# Altium PCB Smart_Podium.PcbDoc (part 2 of 3)
Units mm, origin at the board's own origin, x right, y up, seen from the top; angles counter-clockwise.
Board outline 100 x 100 mm, 4 copper layers (Top Layer, Inner Layer 1 (GND), Inner Layer 2 (GND), Bottom Layer), stack 1.57 mm thick; 107 components, 94 nets, 341 pads, 455 vias.
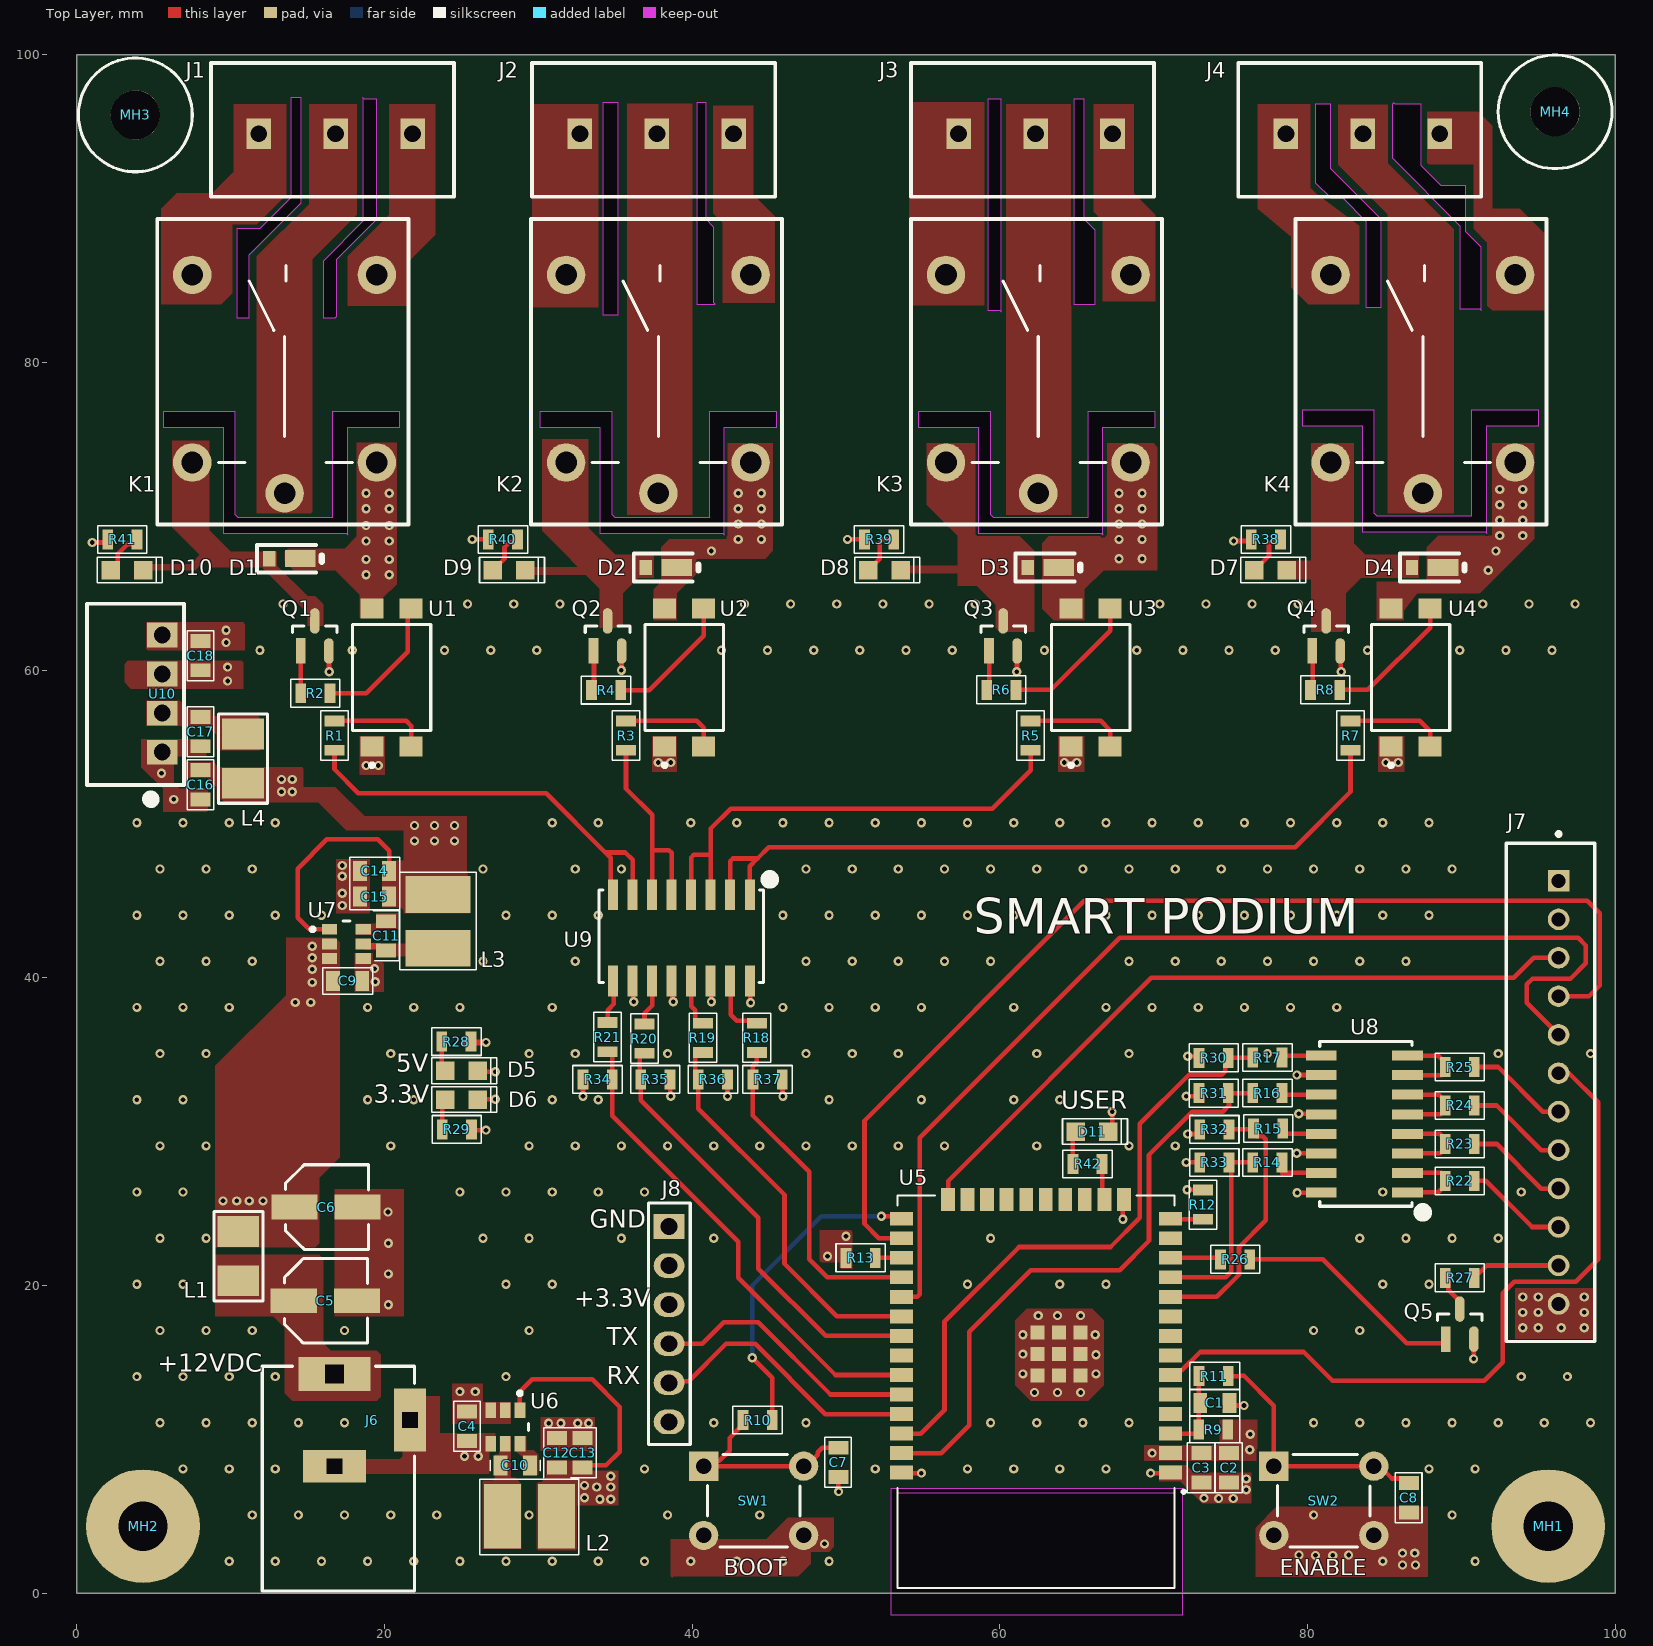
[diagram p0: Top Layer view]

## Part data (continued)
U8 U9: "MMPQ39 Series NPN 1 W 40 V 200 mA General Purpose Transistor - SOIC-16", Case/Package=SOIC, Clock Frequency=250MHz, Collector Base Voltage (VCBO)=60V, Collector Emitter Breakdown Voltage=40V, Collector Emitter Saturation Voltage=100mV, Collector-emitter Voltage-Max=300mV, Current Rating=200mA, Emitter Base Voltage (VEBO)=6V, Manufacturer="ON Semiconductor / Fairchild", Max Operating Temperature=150°C, Max Power Dissipation=1W, Min Operating Temperature=-55°C, Package Quantity=48, Supplier Part Number 1=MMPQ3904FSCT-ND, Category=BJTs, Collector Emitter Voltage (VCEO)=40V, ComponentLink1Description=https://datasheet.ciiva.com/4722/mmpq3904-191413-4722320.pdf?src-supplier=Mouser, ComponentLink1URL=https://datasheet.ciiva.com/4722/mmpq3904-191413-4722320.pdf?src-supplier=Mouser, ComponentLink2Description=https://datasheet.ciiva.com/1193/1727651-1193875.pdf?src-supplier=Element14, ComponentLink2URL=https://datasheet.ciiva.com/1193/1727651-1193875.pdf?src-supplier=Element14, ComponentLink3Description=https://datasheet.ciiva.com/969/mmpq3904-d-969526.pdf?src-supplier=Digi-Key, ComponentLink3URL=https://datasheet.ciiva.com/969/mmpq3904-d-969526.pdf?src-supplier=Digi-Key, ComponentLink4Description=https://datasheet.ciiva.com/15139/getdatasheetpartid-95884-15139210.pdf?src-supplier=Verical, ComponentLink4URL=https://datasheet.ciiva.com/15139/getdatasheetpartid-95884-15139210.pdf?src-supplier=Verical, ComponentLink5Description=https://datasheet.ciiva.com/6362/ffb3904-6362790.pdf?src-supplier=Digi-Key, ComponentLink5URL=https://datasheet.ciiva.com/6362/ffb3904-6362790.pdf?src-supplier=Digi-Key, ComponentLink6Description=https://datasheet.ciiva.com/16776/ffb3904-16776279.pdf?src-supplier=Future+Electronics, ComponentLink6URL=https://datasheet.ciiva.com/16776/ffb3904-16776279.pdf?src-supplier=Future+Electronics, ComponentLink7Description=https://datasheet.ciiva.com/11197/fmb3904-11197433.pdf?src-supplier=Avnet, ComponentLink7URL=https://datasheet.ciiva.com/11197/fmb3904-11197433.pdf?src-supplier=Avnet, ComponentLink8Description=https://datasheet.ciiva.com/11205/fmb3904-11205885.pdf?src-supplier=Avnet, ComponentLink8URL=https://datasheet.ciiva.com/11205/fmb3904-11205885.pdf?src-supplier=Avnet, ComponentLink9Description=https://datasheet.ciiva.com/6362/ffb3904-6362793.pdf?src-supplier=Digi-Key, ComponentLink9URL=https://datasheet.ciiva.com/6362/ffb3904-6362793.pdf?src-supplier=Digi-Key, ComponentLink10Description=https://datasheet.ciiva.com/46415/1785343-46415819.pdf?src-supplier=Element14, ComponentLink10URL=https://datasheet.ciiva.com/46415/1785343-46415819.pdf?src-supplier=Element14, Frequency=250MHz, Gain Bandwidth Product=250MHz, Height=1.5mm, hFE Min=75, Lead Free="Lead Free", Length=10mm, Manufacturer Part Number=MMPQ3904, Max Breakdown Voltage=40V, Max Collector Current=200mA, Mounting Technology="Surface Mount", Number of Elements=4, Packaging="Tape and Reel", Pins=16, Polarity=NPN, Power Dissipation=1W, Pricing 1="1=2.10000, 10=1.88300, 100=1.51340, 500=1.24340, 1000=1.03025 (USD)", Radiation Hardening=No, Reach SVHC Compliant=Yes, RoHS=Yes, RoHS Compliant=Yes, Series=-, Stock 1=17276, Supplier 1=Digi-Key, Transition Frequency=250MHz, Voltage Rating (DC)=40V, Weight=0.143g, Width=4mm
U10: library part B0505S-1WR3, "1W, i/p: 4.5V ~ 5.5V, single o/p: 5V, SIP", Manufacturer=MORNSUN, Supplier Part Number 1=2725-B0505S-1WR3-ND, Category="Board Mount Modules", Manufacturer Part Number=B0505S-1WR3, Pricing 1="1=5.23000, 5=5.15200, 10=5.07800, 25=4.92840, 50=4.77900, 100=4.62970, 250=4.48032, 500=4.18162 (USD)", RoHS=Yes, Stock 1=49202, Supplier 1=Digi-Key

## Via types
v1: diameter 0.6, hole 0.3, Top Layer to Bottom Layer, tented both sides, 455 vias

## Nets (pads, with @x,y where several pads share a name; then routed paths per layer and width w, separated by ;. In a path a pad name is that pad's centre, name@x,y a point inside that pad or via, vN(x,y) a via of type N, cw(c..) or ccw(c..) an arc to the next point about the centre after c; other vN are vias at no path point)
5V_in: C17.2 L4.2 U10.2
+3V3: C2.2 C3.1 C12.2 C13.2 J7.2 J8.3 L2.2 R9.1 R13.2 R29.2 U5.2 U6.1 | length 16
  Top Layer w0.3: R29.2@25.45,30.15 25.5,30.1 v1@26.675,30.1 ; U6.1@28.8,11.899 28.8,13.1 29.6,13.9 33.5,13.9 35.3,12.1 35.3,9.2 34.4,8.3 C13.2@33,8.3 ; C13.2@32.875,8.175 C13.2@33,8.3 ; C13.2@33.175,8.475 C13.2@33,8.3
  other v1: 34,6.1 34.7,6.1 33,6.2 33.8,6.9 34.7,6.9 33,7 34.7,7.6 69.9,9.1 76.25,9.325 76.275,10.325 48.8,21.9 50,23.2 26.6,30.1
+5V: C14.2 C15.2 C16.2 J7.1 L3.2 L4.1 R28.2 U1.1 U2.1 U3.1 U4.1 U7.1 | length 15.4
  Top Layer w0.3: U7.1@16.422,43.154 15.096,43.154 14.35,43.9 14.35,47.1 16.25,49 19.55,49 20.3,48.25 C14.2@20.3,46.95
  Top Layer w0.4: 25.175,35.8 v1(26.6,35.8)
  other v1: 21.95,48.9 23.25,48.9 24.55,48.9 21.95,49.9 23.25,49.9 24.55,49.9 13.3,52.1 14,52.1 13.3,52.9 14,52.9 18.8,53.8 19.6,53.8 37.8,54 38.6,54 64.2,54 65,54 85.1,54 85.9,54
+5V_Relay: C18.2 D1.1 D2.1 D3.1 D4.1 K1.1 K2.1 K3.1 K4.1 R38.2 R39.2 R40.2 R41.2 U1.4 U2.4 U3.4 U4.4 U10.4 | length 4.4
  Top Layer w0.3: v1(1,68.3) 1.8,68.3 R41.2@2,68.5 ; v1(25.7,68.5) R40.2@26.75,68.5 ; v1(50.1,68.5) R39.2@51.2,68.5 ; v1(75.2,68.4) 76.25,68.4 R38.2@76.35,68.5
  other v1: 9.7,61.8 9.7,62.6 18.8,66.2 20.3,66.2 91.75,66.5 18.8,67.2 20.3,67.2 67.75,67.25 69.25,67.25 41.25,67.75 92.25,67.75 18.8,68.4 20.3,68.4 43,68.5 44.5,68.5 67.75,68.5 69.25,68.5 92.5,68.75 94,68.75 18.8,69.4 20.3,69.4 43,69.5 44.5,69.5 67.75,69.5 69.25,69.5 92.5,69.75 94,69.75 18.8,70.5 20.3,70.5 43,70.5 44.5,70.5 67.75,70.5 69.25,70.5 92.5,70.75 94,70.75 18.8,71.5 20.3,71.5 43,71.5 44.5,71.5 67.75,71.5 69.25,71.5 92.5,71.75 94,71.75
+12V: C4.2 C6.1 C9.2 L1.2 U6.2 U6.3 U7.2 U7.3
  other v1: 24.9,13.1 25.9,13.1 9.5,25.5 10.4,25.5 11.2,25.5 12.1,25.5 14.2,38.4 15.2,38.4 15.3,39.7 15.3,40.55 15.3,41.3 15.3,42.05
+12V_JACK: C5.1 J6.1 L1.1
BTN1: J7.3 U5.24 | length 46.9
  Top Layer w0.3: U5.24@56.635,25.59 56.635,26.79 69.845,40 93.4,40 94.7,41.3 J7.3@96.325,41.3
BTN2: J7.4 U5.26 | length 71.2
  Top Layer w0.3: U5.26@53.6,23.07 52.13,23.07 51.2,24 51.2,30.7 65.5,45 98.2,45 99,44.2 99,39.5 98.3,38.8 J7.4@96.325,38.8
BTN3: J7.5 U5.29 | length 70
  Top Layer w0.3: U5.29@53.6,19.26 54.624,19.26 54.8,19.436 54.8,29.6 67.8,42.6 97.6,42.6 98.1,42.1 98.1,40.95 97.1,39.95 94.631,39.95 94.25,39.569 94.25,38.375 J7.5@96.325,36.3
BTN4: J7.6 U5.6 | length 48
  Top Layer w0.3: U5.6@71.1,14.18 71.4,14.48 71.825,14.48 73.02,15.675 79.75,15.675 81.625,13.8 91.5,13.8 92.7,15 92.7,19.5 93.45,20.25 97.435,20.25 98.9,21.715 98.9,31.9 J7.6@97,33.8
BUCK3V3_BST: C10.2 U6.6
BUCK3V3_SW: C10.1 L2.1 U6.5
BUCK5V_BST: C11.2 U7.6
BUCK5V_SW: C11.1 L3.1 U7.5 | length 1.9
  Top Layer w0.4: U7.5@18.621,42.204 18.771,42.054 19.646,42.054 19.925,41.775 C11.1@20.125,41.775 ; L3.1@23.325,41.775 L3.1@23.475,41.925
BUTTON_BOOT: R10.2 U5.25 | length 20.9
  Top Layer w0.3: v1(43.9,15.3) 45.2,14 R10.2@45.2,11.25 ; v1(52.3,24.5) 53.44,24.5 U5.25@53.6,24.34
  Bottom Layer w0.3: v1(43.9,15.3) 43.9,20 48.4,24.5 v1(52.3,24.5)
BUTTON_BOOT_n: C7.2 R10.1 SW1.1 SW1.2 | length 13.8
  Top Layer w0.3: R10.1@43.3,11.25 43.3,10.95 42.435,10.085 42.435,9.265 41.769,8.6 41.1,8.6 SW1.1@40.75,8.25 SW1.2@47.25,8.25 47.419,8.25 48.154,8.984 48.154,9.154 48.45,9.45 C7.2@49.5,9.45
BUTTON_EN: C1.2 R9.2 R11.2 U5.3 | length 5.4
  Top Layer w0.3: U5.3@71.1,10.37 72.725,10.37 72.925,10.57 R9.2@72.925,10.625 72.937,10.637 72.937,14.088 R11.2@72.95,14.1
BUTTON_EN_n: C8.2 R11.1 SW2.1 SW2.2 | length 17
  Top Layer w0.3: R11.1@74.85,14.1 75.6,14.1 75.626,14.126 75.874,14.126 77.814,12.186 SW2.1@77.814,8.25 SW2.2@84.314,8.25 84.694,8.25 85.494,7.45 86.295,7.45 C8.2@86.595,7.15
Coll_Q1: D1.2 D10.1 K1.4 Q1.3
Coll_Q2: D2.2 D9.1 K2.4 Q2.3
Coll_Q3: D3.2 D8.1 K3.4 Q3.3
Coll_Q4: D4.2 D7.1 K4.4 Q4.3
CTS: J8.2
DTR: J8.6